# EAGLE board mosfet-board (EAGLE 9.3.1)
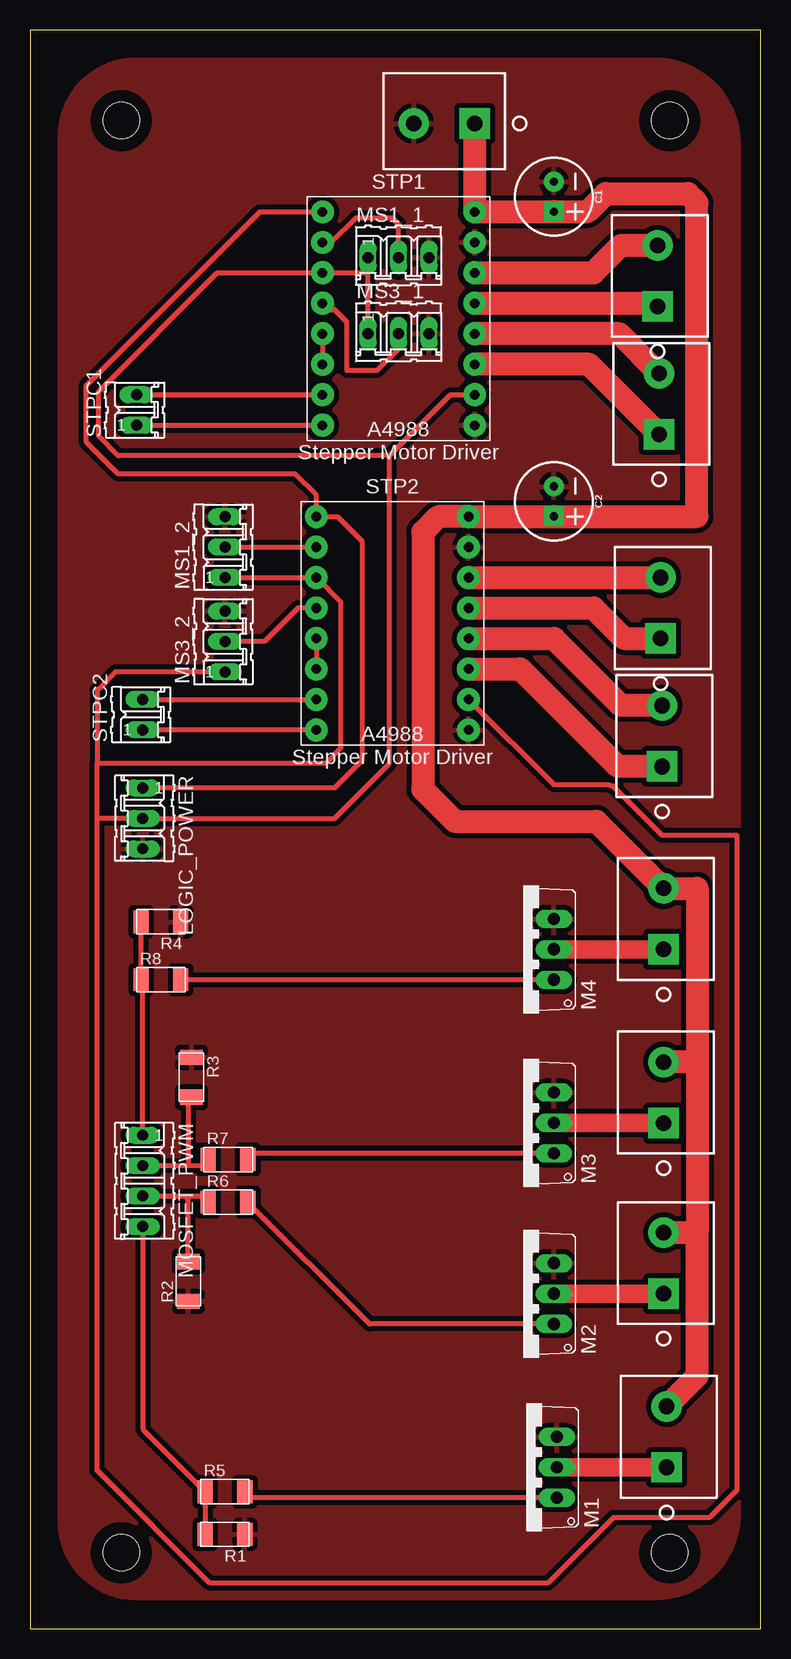
[diagram p0: board, top side]

Size 60.94 x 133.27 mm. Coordinates in mm from the lower left corner, seen from the top.
Outline: 0,0 60.94,0 60.94,133.27 0,133.27 0,0
Copper layers (1*16): Top 0.035mm / dielectric 1.5mm / Bottom 0.035mm
Design rules "default *": minimum track width 6mil, minimum drill 0.35mm, track to track 17mil, track to pad 17mil, pad to pad 17mil, via to via 17mil, smd to smd 17mil, copper to edge 40mil, drill to drill 6mil, minimum pad ring 10mil, minimum via ring 8mil, stop-mask expansion 4mil, vias tented up to drill 0mil, thermal gap 16mil
Holes 3.05 mm at 7.62,125.73 53.34,125.73 7.62,6.35 53.34,6.35

## Footprints (pad centres in the part's own frame; a part is rotated, then mirrored left to right if it is on the bottom)
WEIDMULLER_PM5.08_2 = drill 1.3 pad 2.54 square: 1 -2.54,0 | drill 1.3 pad 2.54: 2 2.54,0
CPOL-RADIAL-2.5MM-6.5MM = drill 0.7 pad 1.651 square: 1 1.25,0 | drill 0.7 pad 1.651: 2 -1.25,0
03P = drill 0.914 long: 1 -2.54,0; 2 0,0; 3 2.54,0
TO220V = drill 1.016 long: 1 -2.54,-2.54; 2 0,-2.54; 3 2.54,-2.54
04P = drill 0.914 long: 1 -3.81,0; 2 -1.27,0; 3 1.27,0; 4 3.81,0
R1206FAB = smd 1.27 x 1.905: 1 -1.651,0; 2 1.651,0
A4988_STEP = drill 0.8 pad 1.905: 1A 6.35,-1.27; 1B 6.35,-3.81; 2A 6.35,1.27; 2B 6.35,3.81; /EN -6.35,8.89; /RST -6.35,-1.27; /SLP -6.35,-3.81; DIR -6.35,-8.89; GND 6.35,6.35; GND2 6.35,-8.89; MS1 -6.35,6.35; MS2 -6.35,3.81; MS3 -6.35,1.27; STEP -6.35,-6.35; VDD 6.35,-6.35; VMOT 6.35,8.89
02P = drill 0.914 long: 1 -1.27,0; 2 1.27,0

## Placement (x,y rotation side)
12VPOWER  [WEIDMULLER_PM5.08_2]  34.54,125.48 180 top
C1  100uF  [CPOL-RADIAL-2.5MM-6.5MM]  43.69,119.38 270 top
C2  100uF  [CPOL-RADIAL-2.5MM-6.5MM]  43.69,93.98 270 top
HEATER1  [WEIDMULLER_PM5.08_2]  53.09,16 90 top
HEATER2  [WEIDMULLER_PM5.08_2]  52.83,30.48 90 top
HEATER3  [WEIDMULLER_PM5.08_2]  52.83,44.7 90 top
HEATER4  [WEIDMULLER_PM5.08_2]  52.83,59.18 90 top
LOGIC_POWER  [03P]  9.4,67.56 270 top
M1  [TO220V]  41.4,13.46 90 top
M1_1  [WEIDMULLER_PM5.08_2]  52.32,112.78 90 top
M1_2  [WEIDMULLER_PM5.08_2]  52.45,102.11 90 top
M1_3  [WEIDMULLER_PM5.08_2]  52.58,85.09 90 top
M1_4  [WEIDMULLER_PM5.08_2]  52.71,74.42 90 top
M2  [TO220V]  41.15,27.94 90 top
M3  [TO220V]  41.15,42.16 90 top
M4  [TO220V]  41.15,56.64 90 top
MOSFET_PWM  [04P]  9.4,37.34 270 top
MS1_1  [03P]  30.73,114.3 0 top
MS1_2  [03P]  16.26,90.17 90 top
MS3_1  [03P]  30.73,107.95 0 top
MS3_2  [03P]  16.26,82.3 90 top
R1  100K  [R1206FAB]  16.26,7.87 180 top
R2  100K  [R1206FAB]  13.21,28.96 90 top
R3  100K  [R1206FAB]  13.46,45.97 270 top
R4  100K  [R1206FAB]  10.92,58.93 180 top
R5  10  [R1206FAB]  16.26,11.43 0 top
R6  10  [R1206FAB]  16.51,35.56 0 top
R7  10  [R1206FAB]  16.51,39.12 0 top
R8  10  [R1206FAB]  10.92,54.1 0 top
STP1  A4988_STEP  [A4988_STEP]  30.73,109.22 0 top
STP2  A4988_STEP  [A4988_STEP]  30.23,83.82 0 top
STPC1  [02P]  8.89,101.6 90 top
STPC2  [02P]  9.4,76.2 90 top

## Library data of the parts
12VPOWER HEATER1-HEATER4 M1_1-M1_4 = WEIDMULLER-PM5.08_2_90BLK; MPN: PM5.08/2/90 BLK; OC_FARNELL: 1131855; OC_NEWARK: 26M1980; PACKAGE: TH-R/A; SUPPLIER: WEIDMULLER
C1 C2 = SparkFun-Capacitors; PROD_ID: CAP-08439
LOGIC_POWER MOSFET_PWM MS1_1 MS1_2 MS3_1 MS3_2 STPC1 STPC2 = con-amp-quick; OC_FARNELL: unknown; OC_NEWARK: unknown
M1-M4 = adafruit
R1-R8 = fab
STP1 STP2 = IC

## Nets
1A_1: M1_2.2 STP1.1A
1A_2: M1_4.2 STP2.1A
1B_1: M1_2.1 STP1.1B
1B_2: M1_4.1 STP2.1B
2A_1: M1_1.1 STP1.2A
2A_2: M1_3.1 STP2.2A
2B_1: M1_1.2 STP1.2B
2B_2: M1_3.2 STP2.2B
12V: 12VPOWER.1 C1.1 C2.1 HEATER1.2 HEATER2.2 HEATER3.2 HEATER4.2 STP1.VMOT STP2.VMOT
DIR_1: STP1.DIR STPC1.1
DIR_2: STP2.DIR STPC2.1
EN: LOGIC_POWER.1 STP1./EN STP2./EN
GND: 12VPOWER.2 C1.2 C2.2 LOGIC_POWER.3 M1.3 M2.3 M3.3 M4.3 MS1_1.3 MS1_2.3 MS3_1.3 MS3_2.3 R1.1 R2.1 R3.1 R4.1 STP1.GND STP1.GND2 STP2.GND STP2.GND2
HEATER1: HEATER1.1 M1.2
HEATER2: HEATER2.1 M2.2
HEATER3: HEATER3.1 M3.2
HEATER4: HEATER4.1 M4.2
MS1_1: MS1_1.2 STP1.MS1
MS1_2: MS1_2.2 STP2.MS1
MS3_1: MS3_1.2 STP1.MS3
MS3_2: MS3_2.2 STP2.MS3
N$1: STP1./RST STP1./SLP
N$2: STP2./RST STP2./SLP
N$3: M3.1 R7.2
N$4: M2.1 R6.2
N$5: M1.1 R5.2
N$6: M4.1 R8.2
S1: MOSFET_PWM.4 R1.2 R5.1
S2: MOSFET_PWM.3 R2.2 R6.1
S3: MOSFET_PWM.2 R3.2 R7.1
S4: MOSFET_PWM.1 R4.2 R8.1
STEP_1: STP1.STEP STPC1.2
STEP_2: STP2.STEP STPC2.2
VCC: LOGIC_POWER.2 MS1_1.1 MS1_2.1 MS3_1.1 MS3_2.1 STP1.MS2 STP1.VDD STP2.MS2 STP2.VDD

## Tracks (layer width: path | path; a pad name or v marks a point on that pad's centre or on a via)
1A_1
  Top 1.905: M1_2.2 49.15,107.95 STP1.1A
1A_2
  Top 1.905: STP2.1A 43.69,82.55 49.28,76.96 M1_4.2
1B_1
  Top 1.905: M1_2.1 46.61,105.41 STP1.1B
1B_2
  Top 1.905: STP2.1B 40.89,80.01 49.02,71.88 M1_4.1
2A_1
  Top 1.905: STP1.2A 52.07,110.49 M1_1.1
2A_2
  Top 1.905: STP2.2A 46.99,85.09 49.53,82.55 M1_3.1
2B_1
  Top 1.905: STP1.2B 46.99,113.03 49.28,115.32 M1_1.2
2B_2
  Top 1.905: STP2.2B M1_3.2
12V
  Top 1.905: 12VPOWER.1 STP1.VMOT 43.67,118.11 C1.1 46.5,118.13 48.01,119.63 54.86,119.63 55.63,118.87 55.61,118.85 55.61,92.73 C2.1 36.6,92.73 STP2.VMOT 34.04,92.71 32.77,91.44 32.77,69.98 35.43,67.31 47.24,67.31 HEATER4.2 55.63,61.72 55.63,47.24 | 55.63,47.24 HEATER3.2 | 55.63,47.24 55.63,33.02 | 55.63,33.02 HEATER2.2 | HEATER1.2 55.63,21.08 55.63,33.02
DIR_1
  Top 0.406: STPC1.1 STP1.DIR
DIR_2
  Top 0.406: STP2.DIR STPC2.1
EN
  Top 0.406: LOGIC_POWER.1 25.4,70.1 27.69,72.39 27.69,90.68 25.65,92.71 STP2./EN 23.88,94.49 22.1,96.27 7.37,96.27 4.7,98.93 4.7,103.63 19.18,118.11 STP1./EN
GND
  pour Top: 8.89,130.81 52.07,130.81 arc-90 59.05,123.83 59.05,9.53 arc-90 52.07,2.54 8.89,2.54 arc-90 2.54,8.89 2.54,124.46 arc-90
HEATER1
  Top 1.524: M1.2 HEATER1.1
HEATER2
  Top 1.524: M2.2 HEATER2.1
HEATER3
  Top 1.524: M3.2 HEATER3.1
HEATER4
  Top 1.524: M4.2 HEATER4.1
MS1_1
  Top 0.406: MS1_1.2 30.73,117.09 30.23,117.6 27.18,117.6 25.15,115.57 STP1.MS1
MS1_2
  Top 0.406: MS1_2.2 STP2.MS1
MS3_1
  Top 0.406: STP1.MS3 24.89,109.98 25.4,109.98 26.42,108.97 26.42,104.9 28.96,104.9 30.73,106.68 MS3_1.2
MS3_2
  Top 0.406: STP2.MS3 22.35,85.09 19.56,82.3 MS3_2.2
N$1
  Top 0.406: STP1./RST STP1./SLP
N$2
  Top 0.406: STP2./RST STP2./SLP
N$3
  Top 0.406: M3.1 18.67,39.62 R7.2
N$4
  Top 0.406: M2.1 28.32,25.4 R6.2
N$5
  Top 0.406: M1.1 18.41,10.92 R5.2
N$6
  Top 0.406: M4.1 R8.2
S1
  Top 0.406: R1.2 R5.1 9.4,16.64 MOSFET_PWM.4
S2
  Top 0.406: MOSFET_PWM.3 12.95,36.07 | 12.95,36.07 14.35,36.07 R6.1 | R2.2 13.21,35.81 12.95,36.07
S3
  Top 0.406: MOSFET_PWM.2 13.21,38.61 | 13.21,38.61 14.35,38.61 R7.1 | R3.2 13.21,44.07 13.21,38.61
S4
  Top 0.406: MOSFET_PWM.1 9.4,53.98 R8.1 R4.2
STEP_1
  Top 0.406: STPC1.2 STP1.STEP
STEP_2
  Top 0.406: STPC2.2 STP2.STEP
VCC
  Top 0.406: MS1_2.1 STP2.MS2 25.91,85.6 25.91,73.41 24.64,72.14 5.59,72.14 | MS3_2.1 7.11,79.76 5.59,78.23 5.59,72.14 | MS3_1.1 28.19,113.03 | 28.19,113.03 MS1_1.1 | 28.19,113.03 STP1.MS2 15.62,113.03 5.72,103.12 5.72,99.44 7.37,97.79 29.97,97.79 | 29.97,97.79 29.97,72.14 25.4,67.56 LOGIC_POWER.2 5.59,67.56 | 29.97,97.79 35.05,102.87 STP1.VDD | STP2.VDD 43.69,70.36 48.3,70.36 48.36,70.29 48.58,70.29 52.71,66.17 58.93,66.17 58.93,11.56 56.64,9.27 48.64,9.27 43.18,3.81 14.99,3.81 5.59,13.21 5.59,67.56 | 5.59,67.56 5.59,72.14